# EAGLE board TRABALHO DE LIP-GENIUS (EAGLE 9.7.0)

Size 103.56 x 105.96 mm. Coordinates in mm from the lower left corner, seen from the top.
Outline: 0,0 103.56,0 103.56,105.96 0,105.96 0,0
Copper layers (1*16): Top 0.035mm / dielectric 1.5mm / Bottom 0.035mm
Design rules "default": minimum track width 6mil, minimum drill 0.35mm, track to track 6mil, track to pad 6mil, pad to pad 6mil, via to via 6mil, smd to smd 6mil, copper to edge 40mil, drill to drill 6mil, minimum pad ring 10mil, minimum via ring 8mil, stop-mask expansion 4mil, vias tented up to drill 0mil, thermal gap 10mil

## Footprints (pad centres in the part's own frame; a part is rotated, then mirrored left to right if it is on the bottom)
LEDRD254W60D565H860B = drill 0.981 pad 1.581: 1 -1.27,0; 2 1.27,0
LEDRD254W60D565H860B_Y = drill 0.981 pad 1.581: 1 -1.27,0; 2 1.27,0
LEDRD254W60D565H860B_G = drill 0.981 pad 1.581: 1 -1.27,0; 2 1.27,0
LEDRD254W60D565H860B_B = drill 0.981 pad 1.581: 1 -1.27,0; 2 1.27,0
7SEG-13 = drill 0.813 long: 1 -5.08,-7.62; 2 -2.54,-7.62; 3 0,-7.62; 4 2.54,-7.62; 5 5.08,-7.62; 6 5.08,7.62; 7 2.54,7.62; 8 0,7.62; 9 -2.54,7.62; 10 -5.08,7.62
PIEZO = drill 1 pad 1.6: 1 -3.5,0; 2 3.5,0
RESAD1016W63L850D250B = drill 0.83 pad 1.43: 1 -5.08,0; 2 5.08,0
SWITCH-MOMENTARY-PTH-6.5MM = drill 1.016 pad 1.88: 1 -3.251,2.261; 2 3.251,2.261; 3 -3.251,-2.261; 4 3.251,-2.261
ARDUINO-UNO-R3-SHIELD = drill 1.016 pad 1.88: 3.3V 24.13,-2.54; 5V 24.13,0; A0 24.13,12.7; A1 24.13,15.24; A2 24.13,17.78; A3 24.13,20.32; A4 24.13,22.86; A5 24.13,25.4; AREF -24.13,-13.97; D2 -24.13,20.32; D3 -24.13,17.78; D4 -24.13,15.24; D5 -24.13,12.7; D6 -24.13,10.16; D7 -24.13,7.62; D8 -24.13,3.81; D9 -24.13,1.27; D10 -24.13,-1.27; D11 -24.13,-3.81; D12 -24.13,-6.35; D13 -24.13,-8.89; GND@0 24.13,2.54; GND@1 24.13,5.08; GND@2 -24.13,-11.43; IOREF 24.13,-7.62; NC 24.13,-10.16; RES 24.13,-5.08; RX -24.13,25.4; SCL -24.13,-19.05; SDA -24.13,-16.51; TX -24.13,22.86; VIN 24.13,7.62

## Placement (x,y rotation side)
D5  RED  [LEDRD254W60D565H860B]  32.05,24.26 180 top
D6  YELLOW  [LEDRD254W60D565H860B_Y]  44.76,24.26 180 top
D7  GREEN  [LEDRD254W60D565H860B_G]  57.45,24.26 180 top
D8  BLUE  [LEDRD254W60D565H860B_B]  70.16,24.26 180 top
DIGITD11  7SEG-CA  [7SEG-13]  94.28,14.1 0 top
PIEZOBZ1  PIEZO  [PIEZO]  11.73,19.18 180 top
RR1  0.22k  [RESAD1016W63L850D250B]  30.79,31.88 90 top
RR2  0.22k  [RESAD1016W63L850D250B]  43.48,31.88 90 top
RR3  0.22k  [RESAD1016W63L850D250B]  56.19,31.88 90 top
RR4  0.22k  [RESAD1016W63L850D250B]  68.89,31.88 90 top
RR5  0.22k  [RESAD1016W63L850D250B]  94.28,31.88 90 top
SB1  SWITCH_MOMENTARY  [SWITCH-MOMENTARY-PTH-6.5MM]  38.41,12.83 90 top
SB2  SWITCH_MOMENTARY  [SWITCH-MOMENTARY-PTH-6.5MM]  51.1,12.83 90 top
SB3  SWITCH_MOMENTARY  [SWITCH-MOMENTARY-PTH-6.5MM]  63.8,12.83 90 top
SB4  SWITCH_MOMENTARY  [SWITCH-MOMENTARY-PTH-6.5MM]  76.5,12.83 90 top
UARDUINO1  ARDUINO-UNO-R3-SHIELD  [ARDUINO-UNO-R3-SHIELD]  64.85,76.12 270 top

## Library data of the parts
D5 = Tinkercad; CATEGORY: Opto-Electronic; SUB-CATEGORY: LED; VALUE: LED_RED
D6 = Tinkercad; CATEGORY: Opto-Electronic; SUB-CATEGORY: LED; VALUE: LED_YELLOW
D7 = Tinkercad; CATEGORY: Opto-Electronic; SUB-CATEGORY: LED; VALUE: LED_GREEN
D8 = Tinkercad; CATEGORY: Opto-Electronic; SUB-CATEGORY: LED; VALUE: LED_BLUE
DIGITD11 = Tinkercad; CATEGORY: Opto-Electronic; SUB-CATEGORY: Display; TYPE: 7-Segment
PIEZOBZ1 RR1-RR5 SB1-SB4 UARDUINO1 = Tinkercad

## Nets
D5_C: D5.2 RR1.1
D6_C: D6.2 RR2.1
D7_C: D7.2 RR3.1
D8_C: D8.2 RR4.1
DIGITD11_CA2: DIGITD11.8 RR5.1
UARDUINO1_A0: DIGITD11.10 UARDUINO1.A0
UARDUINO1_A1: DIGITD11.7 UARDUINO1.A1
UARDUINO1_A2: DIGITD11.6 UARDUINO1.A2
UARDUINO1_A3: DIGITD11.5 UARDUINO1.A3
UARDUINO1_A4: DIGITD11.4 UARDUINO1.A4
UARDUINO1_D2: SB3.1 SB3.2 UARDUINO1.D2
UARDUINO1_D3: SB4.1 SB4.2 UARDUINO1.D3
UARDUINO1_D6: PIEZOBZ1.1 UARDUINO1.D6
UARDUINO1_D7: DIGITD11.1 UARDUINO1.D7
UARDUINO1_D8: DIGITD11.2 UARDUINO1.D8
UARDUINO1_D9: DIGITD11.9 UARDUINO1.D9
UARDUINO1_D10: D5.1 UARDUINO1.D10
UARDUINO1_D11: D6.1 UARDUINO1.D11
UARDUINO1_D12: D7.1 UARDUINO1.D12
UARDUINO1_D13: D8.1 UARDUINO1.D13
UARDUINO1_GND: PIEZOBZ1.2 RR1.2 RR2.2 RR3.2 RR4.2 RR5.2 SB1.3 SB1.4 SB2.3 SB2.4 SB3.3 SB3.4 SB4.3 SB4.4 UARDUINO1.GND@0 UARDUINO1.GND@1 UARDUINO1.GND@2
UARDUINO1_RX: SB1.1 SB1.2 UARDUINO1.RX
UARDUINO1_TX: SB2.1 SB2.2 UARDUINO1.TX

## Tracks (layer width: path | path; a pad name or v marks a point on that pad's centre or on a via)
D5_C  (1 unrouted)
D6_C  (1 unrouted)
D7_C  (1 unrouted)
D8_C  (1 unrouted)
DIGITD11_CA2  (1 unrouted)
UARDUINO1_A0  (1 unrouted)
UARDUINO1_A1  (1 unrouted)
UARDUINO1_A2  (1 unrouted)
UARDUINO1_A3  (1 unrouted)
UARDUINO1_A4  (1 unrouted)
UARDUINO1_D2  (2 unrouted)
UARDUINO1_D3  (2 unrouted)
UARDUINO1_D6  (1 unrouted)
UARDUINO1_D7  (1 unrouted)
UARDUINO1_D8  (1 unrouted)
UARDUINO1_D9  (1 unrouted)
UARDUINO1_D10  (1 unrouted)
UARDUINO1_D11  (1 unrouted)
UARDUINO1_D12  (1 unrouted)
UARDUINO1_D13  (1 unrouted)
UARDUINO1_GND  (16 unrouted)
UARDUINO1_RX  (2 unrouted)
UARDUINO1_TX  (2 unrouted)